# Altium PCB OmniBotRemote.PcbDoc
Units mil, origin at the board's own origin, x right, y up, seen from the top; angles counter-clockwise.
Board outline 5635.03 x 2160.03 mil, 2 copper layers (Top Layer, Bottom Layer); 49 components, 41 nets, 200 pads, 84 vias.
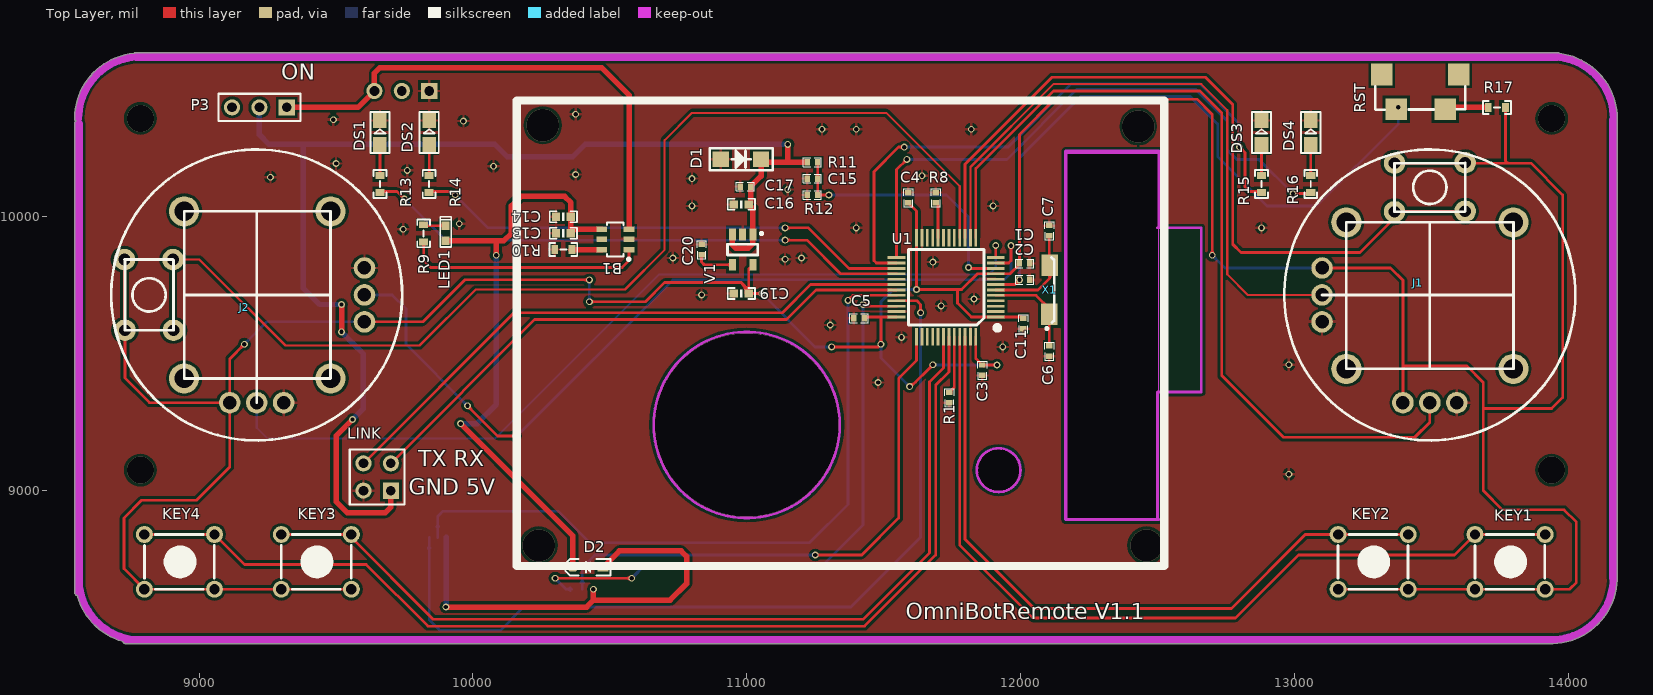
[diagram p0: Top Layer view]
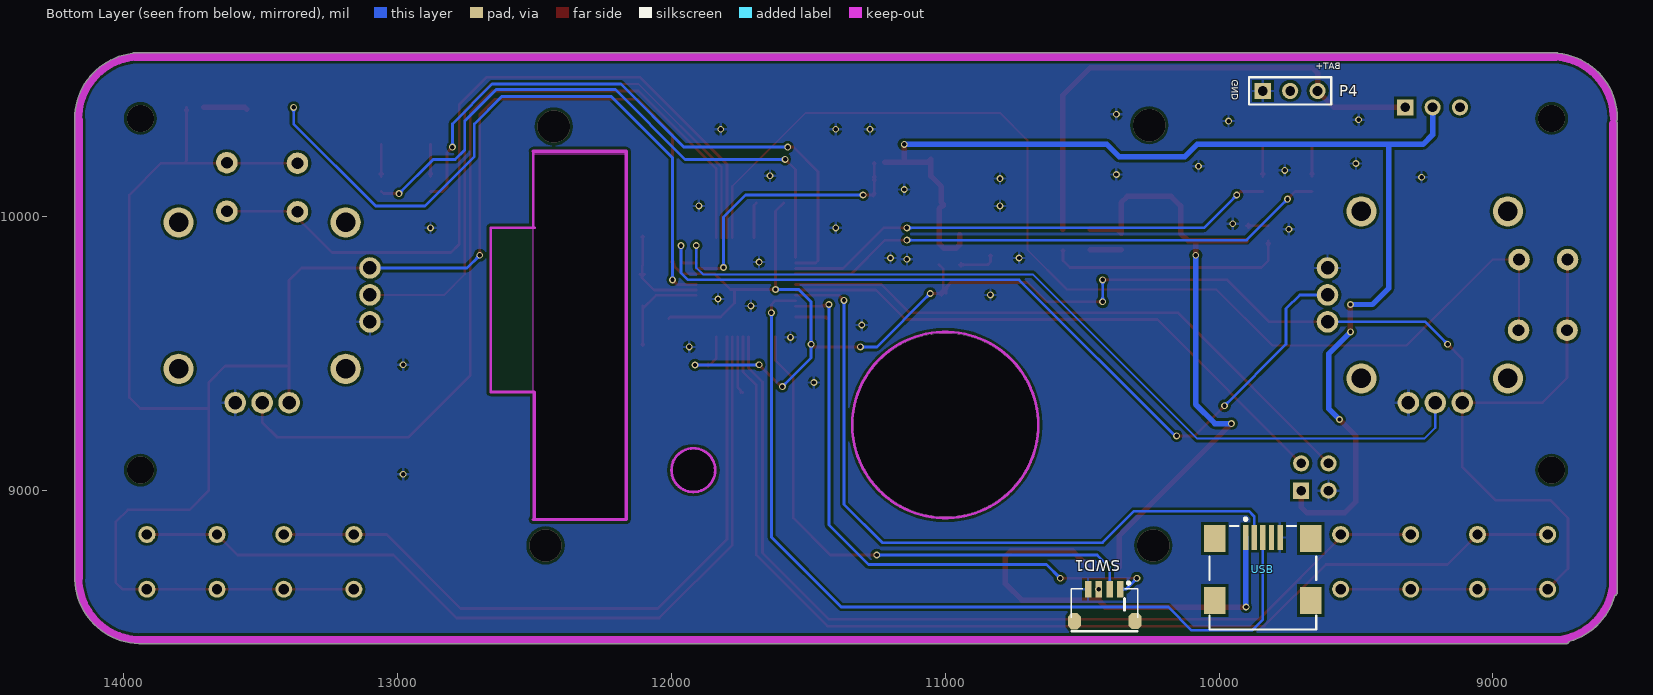
[diagram p1: Bottom Layer view, seen from below]
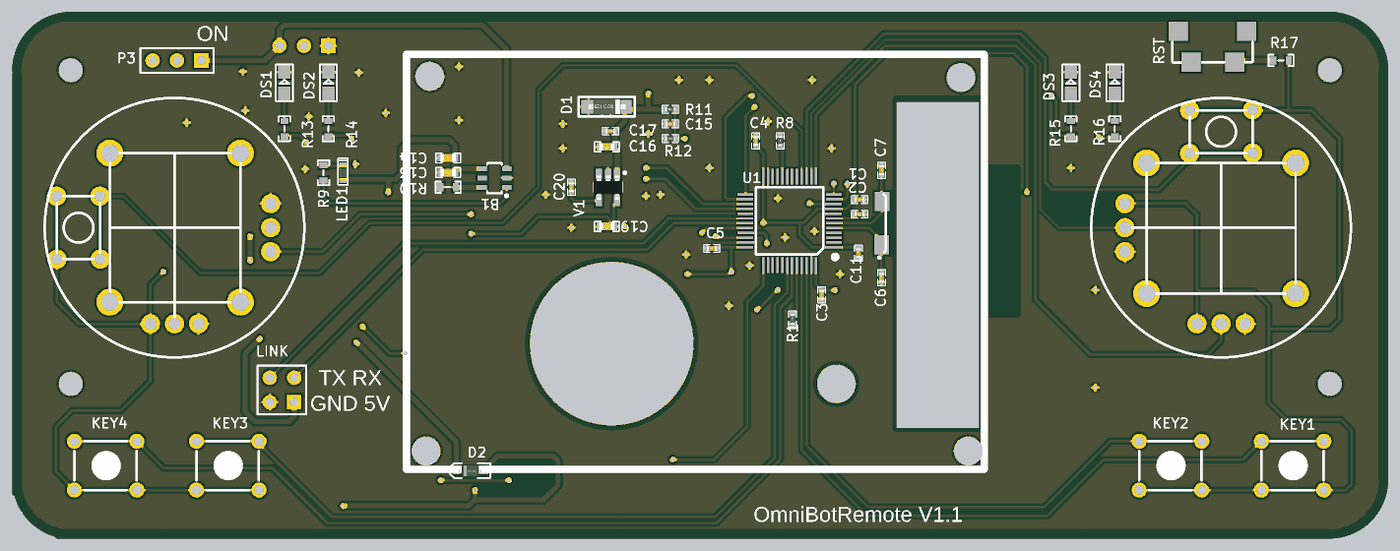
[diagram p2: 3D render of the assembled board from above, using the file's embedded part models]

## Layer stack, top to bottom
Top Layer: signal copper 1.4
Dielectric: dielectric 12.6, FR-4, Dk 4.8
Bottom Layer: signal copper 1.4

## Board outline
8554.94,8615.86 ccw(c8786.11,8680) 8721.22,8449.04 ccw(c8735,8455) 8735,8439.99 13938.89,8439.99 ccw(c13938.89,8455) 13945,8441.28 ccw(c13938.89,8681.11) 14178.72,8675 ccw(c14165,8681.11) 14180.01,8681.11 14180.01,10355 ccw(c14165,10355) 14179.82,10357.4 ccw(c14166.11,10358.89) 14179.9,10358.89 ccw(c13940,10358.89) 13968.97,10597.04 ccw(c13960,10585) 13960,10600.01 8770,10600.01 ccw(c8770,10585) 8761.97,10597.69 ccw(c8785,10358.89) 8545.1,10358.89 ccw(c8558.89,10358.89) 8548.57,10349.74 ccw(c8560,10340) 8544.99,10340 8544.99,8630 ccw(c8560,8630)
cut-out: 12165,10230 12165,8895 12505,8895 12505,10230

## Design rules (kind name [scope] priority, off if disabled: settings)
Clearance Clearance_1 [(InPolygon)] p1: gap=10
Clearance [All] p2: gap=6
PolygonConnect [All] p1: connectstyle=Relief reliefconductorwidth=10 reliefentries=4 polygonreliefangle="90 Angle"
RoutingVias [All] p1: holewidth=28 width=50 viastyle="Through Hole" minholewidth=16 minwidth=25 maxholewidth=28 maxwidth=50
SilkscreenOverComponentPads [All] p1: minsilkscreentomaskgap=10
SolderMaskExpansion [All] p1: expansion=4
TestPointUsage FabricationTestPointUsage [All] p1: valid=0 allowmultiple=FALSE
Testpoint FabricationTestpoint [All] p1: side=3 testpointundercomponent=TRUE minsize=40 maxsize=100 preferedsize=60 minholesize=0 maxholesize=40 preferedholesize=32 testpointgrid=1 style=297 order=0123456789
Width [All] p1: maxlimit=40 minlimit=8 preferedwidth=10 minimp=50.000000 maximp=50.000000 favimp=50.000000
23 further rules are at their usual default settings.

## Components (designator, comment, footprint, x,y, rotation, side; value= is the part's Value field where it differs from the comment)
B1 "TP4059" SOT23-6S 10570,9880.63 r180 top
C1 "1UF" "C 0402" 12015,9830 r180 top
C2 "0.1UF" "C 0402" 12015,9770 r180 top
C3 "1UF" "C 0402" 11860,9440 r90 top
C4 "0.1UF" "C 0402" 11590,10070 r270 top
C5 "0.1UF" "C 0402" 11410,9630 r0 top
C6 "20PF" "C 0402" 12105,9510 r90 top
C7 "20PF" "C 0402" 12105,9950 r270 top
C11 "0.1UF" "C 0402" 12010,9610 r270 top
C13 "0.1UF" C0603 10330,9940.63 r0 top
C14 "10UF" C0603 10330,10000.63 r0 top
C15 "22uF" "C 0402" 11240,10140 r180 top
C16 "10uF" C0603 10980,10045.63 r180 top
C17 "0.1uF" "C 0402" 10995,10110.63 r0 top
C19 "10uF" C0603 10980,9720 r180 top
C20 "0.1uF" "C 0402" 10835,9880.63 r90 top
D1 "IN4733 5.1V" 1n4148-SOD123 10915,10210.63 r0 top
D2 "BAT54WS" SOD-323 10420,8720 r0 top
DS1 "LED1" SMDLED 9660,10265 r90 top
DS2 "LED1" SMDLED 9840,10265 r90 top
DS3 "LED1" SMDLED 12880,10265 r90 top
DS4 "LED1" SMDLED 13060,10265 r90 top
J1 "方向摇杆" 摇杆2 13560,9885 r270 top
J2 "方向摇杆" 摇杆2 9040,9780 r0 top
KEY1 "KEY_M" KEY_M 13660,8840 r0 top
KEY2 "KEY_M" KEY_M 13160,8840 r0 top
KEY3 "KEY_M" KEY_M 9300,8840 r0 top
KEY4 "KEY_M" KEY_M 8800,8840 r0 top
LED1 "DS0" LED_0603 9900,9940 r90 top
LINK "Header 4" HDR2X2 9700,9000 r90 top
P3 "Header 3" HDR1X3 9320,10400 r180 top
P4 "Header 3" HDR1X3 9840,10460 r180 bottom
R1 "1K" "R 0402" 11740,9340 r270 top
R8 "1K" "R 0402" 11690,10070 r270 top
R9 "1K" R0603 9820,9940 r90 top
R10 "1K" R0603 10330,9880.63 r0 top
R11 "4.7K" "R 0402" 11240,10200 r0 top
R12 "4.7K" "R 0402" 11240,10080 r0 top
R13 "100R" R0603 9660,10120 r90 top
R14 "100R" R0603 9840,10120 r90 top
R15 "100R" R0603 12880,10120 r90 top
R16 "100R" R0603 13060,10120 r90 top
R17 "10K" R0603 13740,10400 r0 top
RST "Header 2" KEY_SAD 13600,10520 r180 top
SWD1 "Header 4" "SH1.0-4P - UP" 10360,8640 r0 bottom
U1 "STM32F103C8" LQFP48S 11910,9635 r180 top
USB "USB-B(Mini)" USB/SM0.8-6H5_M 9840,8520 r270 bottom
V1 "RT9193-3.3/LP2985/SPX3819" SOT23-5 10985,9880.32 r90 top
X1 "8MHZ" PXCL 12105,9645 r0 top

## Footprints (in the part's own frame and the unit in brackets; to place one, negate y for a bottom-side part, rotate by r counter-clockwise, add the part's x,y. Pads: shape width x height; smd on the part's side, far side on the other; paste and mask are expansions set on the pad)
1n4148-SOD123 [mm]
  rect 1.5x1.4 smd: 1(-0.254,0) 2(3.494,0)
  silkscreen extent -1.27,-1.02 4.57,1.02, body extent -0.25,-0.85 3.6,0.85, height 1.42
C0603 [mil]
  rect 30x30 smd: 1(-27,0) 2(27.5,-0.06)
  silkscreen extent -50,-20 50,20, body extent -31,-16 31,16, height 12
"C 0402" [mil]
  rect 20x23.62 smd: 1(-19,0) 2(19,0)
  silkscreen extent -33,-16 33,16, body extent -20,-10 20,10, height 20
HDR1X3 [mm] "Connector; Header; 3 Position"
  rect 1.5x1.5 hole 0.9: 1(0,0)
  round 1.5 hole 0.9: 2(2.54,0) 3(5.08,0)
  silkscreen extent -1.27,-1.27 6.35,1.27
HDR2X2 [mm]
  rect 1.5x1.5 hole 0.9: 1(0,0)
  round 1.5 hole 0.9: 2(0,2.54) 3(2.54,0) 4(2.54,2.54)
  silkscreen extent -1.27,-1.27 3.81,3.81
KEY_M [mil]
  round 62 hole 38: 1(0,0) 1(255.91,0) 2(0,-200) 2(255.91,-200)
  silkscreen extent 0,-200 255,0
KEY_SAD [mm]
  rect 2x2 smd: 1(1.245,3.226) 2(5.791,3.226) ""(0,0) ""(7.112,0)
  silkscreen extent -0.61,1.12 7.72,3.28
LED_0603 [mil]
  rect 30x30 smd: 1(-27,0) 2(27.5,-0.06)
  silkscreen extent -50,-20 60,20, body extent -32,-16 32,16, height 43
LQFP48S [mil] "DPIN-0.5"
  rect 65x10 smd: 1(0.42,0.29) 2(0.42,-19.39) 3(0.42,-39.08) 4(0.42,-58.76) 5(0.42,-78.45) 6(0.42,-98.13) 7(0.42,-117.82) 8(0.42,-137.5) 9(0.42,-157.19) 10(0.42,-176.87) 11(0.42,-196.56) 12(0.42,-216.24) 25(362.63,-216.24) 26(362.63,-196.56) 27(362.63,-176.87) 28(362.63,-157.19) 29(362.63,-137.5) 30(362.63,-117.82) 31(362.63,-98.13) 32(362.63,-78.45) 33(362.63,-58.76) 34(362.63,-39.08) 35(362.63,-19.39) 36(362.63,0.29)
  rect 10x65 smd: 13(73.26,-289.08) 14(92.94,-289.08) 15(112.63,-289.08) 16(132.31,-289.08) 17(152,-289.08) 18(171.68,-289.08) 19(191.37,-289.08) 20(211.05,-289.08) 21(230.74,-289.08) 22(250.42,-289.08) 23(270.11,-289.08) 24(289.79,-289.08) 37(289.79,73.13) 38(270.11,73.13) 39(250.42,73.13) 40(230.74,73.13) 41(211.05,73.13) 42(191.37,73.13) 43(171.68,73.13) 44(152,73.13) 45(132.31,73.13) 46(112.63,73.13) 47(92.94,73.13) 48(73.26,73.13)
  silkscreen extent -10,-246 319,46
PXCL [mm]
  rect 1.5x2 smd: 1(0,0) 2(0.051,4.521)
  silkscreen extent -0.34,-1.45 0.46,5.26
R0603 [mil] "ÌùÆ"
  rect 25x33 smd: 1(-31.5,0) 2(31.5,0)
  silkscreen extent -51,-24 51,24, body extent -32,-16 32,16, height 20
"R 0402" [mil]
  rect 20x23.62 smd: 1(-19,0) 2(19,0)
  silkscreen extent -33,-16 33,16, body extent -20,-10 20,10, height 12
"SH1.0-4P - UP" [mm]
  rect 0.6x1.55 smd: 1(0,0) 2(1,0) 3(2,0) 4(3,0)
  oct 1.2x1.5 smd: 1.(4.279,2.972) A(-1.346,2.946)
  silkscreen extent -1.63,-0.7 4.55,3.89
SMDLED [mm]
  rect 1.4x1.27 smd: 1(0.001,-0.002) 2(2.211,-0.002)
  silkscreen extent -0.8,-0.89 3.01,0.89
SOD-323 [mm] "1.8x1.3X0.9mm（长宽高，不包括引脚）"
  rect 1x0.8 smd: 1(1.4,0)
  oct 1x0.8 smd: 2(-1.4,0)
  silkscreen extent -2.11,-0.76 2.11,0.76, body extent -1.31,-0.67 1.34,0.63, height 1
SOT23-5 [mm]
  rect 1.1x0.65 smd: 1(1.4,-0.95) 2(1.4,0) 3(1.4,0.95) 4(-1.4,0.95) 5(-1.4,-0.95)
  silkscreen extent -0.5,-1.88 1.62,1.4, body extent -1.28,-1.5 1.22,1.5, height 1.05
SOT23-6S [mil]
  rect 39.37x20 smd: 1(0,0) 2(0,-37.5) 3(0,-74.8) 4(100,-74.8) 5(100,-37.5) 6(100,0)
  silkscreen extent 0,-99 80,35
USB/SM0.8-6H5_M [mm]
  rect 2.3x0.5 smd: 1(-7.85,-1.6) 2(-7.85,-0.8) 3(-7.85,0) 4(-7.85,0.8) 5(-7.85,1.6)
  rect 2.5x2 smd: 6(-7.75,4.45) 7(-1.996,4.45) 8(-7.75,-4.45) 9(-1.996,-4.45)
  silkscreen extent -9.67,-4.95 0.7,4.95
摇杆2 [mm]
  round 2.8 hole 1.8: 0(-2.413,6.102) 0(-2.413,-9.398) 0(11.176,6.102) 0(11.176,-9.398)
  round 2 hole 1.25: 1(14.318,0.849) 2(14.318,-1.651) 3(14.318,-4.151) 4(6.818,-11.651) 5(4.318,-11.651) 6(1.818,-11.651)
  round 2 hole 1.1: J1(-7.95,1.626) J1(-7.904,-4.925) J2(-3.45,1.626) J2(-3.404,-4.925)
  silkscreen extent -9.18,-15.15 17.82,11.85

## Part data
C1 C2 C3 C4 C5 C11 C13 C14 C15 C16 C19: library part CAP, "Capacitor"
C6 C7: library part C2, "0805"
C17 C20: library part Capacitor, "普通电容"
D1: library part ZENER3, "Zener Diode"
D2: library part BAT54, "单肖特基二极管"
DS1 DS2 DS3 DS4: library part LED2, "Typical RED, GREEN, YELLOW, AMBER GaAs LED"
J1 J2: library part 摇杆_1, "摇杆"
LED1: library part LED, "Typical RED, GREEN, YELLOW, AMBER GaAs LED"
LINK SWD1: "Header, 4-Pin"
P3 P4: "Header, 3-Pin"
R1 R8 R9 R10: library part Res1, "Resistor"
R11 R12 R13 R14 R15 R16 R17: library part Res2, "0603"
RST: "Header, 2-Pin"
U1: library part STM32F103C6
USB: library part USB5
V1: "降压IC"
X1: library part XTAL, "Crystal Oscillator"

## Via types
v1: diameter 25, hole 16, Top Layer to Bottom Layer, 74 vias
v2: diameter 98.43, hole 98.43, Top Layer to Bottom Layer, 4 vias
v3: diameter 118.11, hole 118.11, Top Layer to Bottom Layer, 4 vias
v4: diameter 157.48, hole 157.48, Top Layer to Bottom Layer, 1 vias
v5: diameter 669.29, hole 669.29, Top Layer to Bottom Layer, 1 vias

## Nets (pads, with @x,y where several pads share a name; then routed paths per layer and width w, separated by ;. In a path a pad name is that pad's centre, name@x,y a point inside that pad or via, vN(x,y) a via of type N, cw(c..) or ccw(c..) an arc to the next point about the centre after c; other vN are vias at no path point)
3.3V: C1.2 C3.2 C4.2 C5.2 C11.1 C19.1 J1.3 J1.6 J1.J1 J2.3 J2.6 J2.J1 KEY1.2 KEY2.2 KEY3.2 KEY4.2 R17.2 U1.1 U1.9 U1.24 U1.36 U1.48 V1.5 | length 15940.7
  Top Layer w10: J2.J1@8727,9587.93 J2.J1@8727,9844 ; 8728.83,9451.17 8728.83,9586.09 8728.83,9411.17 8818.7,9321.3 J2.6 ; v1@9157.5,9535 cw(c9139.39,9535) 9152.2,9522.2 cw(c9165,9509.39) v1@9165,9527.5 ; v1(9165,9535) 9111.57,9481.57 J2.6 ; KEY3.2@9555.91,8640 9300,8640 9055.91,8640 8800,8640 8725,8715 8725,8900 8790,8965 8990,8965 9111.57,9086.57 J2.6 ; J2.3 9816.57,9616.57 9970,9770 v1(10425,9770) ; v1@10419.7,9764.7 ccw(c10406.89,9751.89) 10406.89,9770 ccw(c10406.89,9788.11) v1@10419.7,9775.3 ; v1(10425,9690) 10630,9690 10700,9760 10760,9760 10980,9760 11007,9733 C19.1 ; v1@10430.3,9684.7 cw(c10443.11,9671.89) 10443.11,9690 cw(c10443.11,9708.11) v1@10430.3,9695.3 ; 10980.74,9759.26 cw(c10941.47,9720) C19.1@10997,9720 ; 10997.81,9742.19 cw(c10975.62,9720) C19.1 ; C19.1@10999.93,9727.07 ccw(c10982.86,9744.14) 11007,9744.14 ccw(c11031.14,9744.14) 11014.07,9727.07 ccw(c11031.14,9744.14) 11031.14,9720 ccw(c11031.14,9695.86) C19.1@11014.07,9712.93 ; V1.5 11007,9809.8 C19.1 ; v1@11049.7,9714.7 ccw(c11036.89,9701.89) 11036.89,9720 ccw(c11036.89,9738.11) v1@11049.7,9725.3 ; v1(11055,9720) C19.1 ; v1(11310,9525) 11480,9525 v1(11490,9535) 11490,9634.71 ; v1@11315.3,9519.7 cw(c11328.11,9506.89) 11328.11,9525 cw(c11328.11,9543.11) v1@11315.3,9530.3 ; C5.2 11433.71,9634.71 11490,9634.71 ; C5.2@11432.54,9628.28 cw(c11448.07,9612.74) 11448.07,9634.71 ; v1@11484.7,9540.3 ccw(c11471.89,9553.11) 11490,9553.11 ccw(c11508.11,9553.11) v1@11495.3,9540.3 ; U1.36 11490,9634.71 ; C4.2 11620.21,10020.79 U1.24 v1@11620.21,9735.21 ; v1@11595,9387.5 ccw(c11595,9417.68) 11616.34,9396.34 ; v1@11600,9380 v1(11680,9460) ; v1(11620,9735) 11770,9735 ; v1@11625.3,9729.7 cw(c11638.11,9716.89) 11638.11,9735 cw(c11638.11,9753.11) v1@11625.3,9740.3 ; v1@11672.5,9460 cw(c11654.39,9460) 11667.2,9447.2 cw(c11680,9434.39) v1@11680,9452.5 ; U1.48 11836.74,9482.26 C3.2 v1(11914,9459) ; C3.2@11865.35,9455.46 cw(c11873.88,9446.93) 11873.88,9459 cw(c11873.88,9471.07) C3.2@11865.35,9462.54 ; v1@11908.7,9453.7 ccw(c11895.89,9440.89) 11895.89,9459 ccw(c11895.89,9477.11) v1@11908.7,9464.3 ; 11985.92,9815.92 ccw(c11973.64,9828.19) C1.2@11991,9828.19 ; C1.2@11992.46,9835.35 ccw(c11983.93,9843.88) 11996,9843.88 ccw(c12008.07,9843.88) C1.2@11999.54,9835.35 ; C11.1 12004.29,9634.71 U1.1 11820.29,9634.71 11770,9685 11770,9735 ; v1@12694.7,9865.3 ccw(c12681.89,9878.11) 12700,9878.11 ccw(c12718.11,9878.11) v1@12705.3,9865.3 ; v1(12700,9860) 12700,10375 12645,10430 12125,10430 11996,10301 C1.2 11996,9826 11962.19,9792.19 U1.9 11842.19,9792.19 11785,9735 11770,9735 ; J1.6 13351.57,9813.43 13396.57,9768.43 13396.57,9455 ; KEY2.2@13160,8640 13415.91,8640 13660,8640 13915.91,8640 14005,8640 14030,8665 14030,8885 13985,8930 13760,8930 13690,9000 13690,9300 ; J1.J1@13366.09,10196.17 13780,10196.17 ; J1.3 13396.57,9455 ; R17.2@13766.2,10390.7 cw(c13753.39,10377.89) 13771.5,10377.89 cw(c13789.61,10377.89) R17.2@13776.8,10390.7 ; R17.2 13771.5,10204.67 13780,10196.17 ; 13396.57,9455 13630,9455 13690,9395 13690,9300 ; 13690,9300 13940,9300 13980,9340 13980,10080 13863.83,10196.17 13780,10196.17
  Bottom Layer w10: v1(9165,9535) 9246.57,9616.57 J2.3 ; v1@9165,9542.5 ccw(c9165,9560.61) 9177.8,9547.8 ccw(c9190.61,9535) v1@9172.5,9535 ; v1@10419.7,9695.3 ccw(c10406.89,9708.11) 10425,9708.11 ccw(c10443.11,9708.11) v1@10430.3,9695.3 ; v1@10419.7,9764.7 cw(c10406.89,9751.89) 10425,9751.89 cw(c10443.11,9751.89) v1@10430.3,9764.7 ; v1(10425,9690) v1(10425,9770) ; v1@11055,9712.5 cw(c11055,9694.39) 11067.8,9707.2 cw(c11080.61,9720) v1@11062.5,9720 ; v1(11055,9720) 11250,9525 v1(11310,9525) ; v1@11304.7,9519.7 ccw(c11291.89,9506.89) 11291.89,9525 ccw(c11291.89,9543.11) v1@11304.7,9530.3 ; v1@11484.7,9529.7 cw(c11471.89,9516.89) 11490,9516.89 cw(c11508.11,9516.89) v1@11495.3,9529.7 ; v1@11484.7,9540.3 ccw(c11471.89,9553.11) 11490,9553.11 ccw(c11508.11,9553.11) v1@11495.3,9540.3 ; v1@11587.5,9380 ccw(c11569.39,9380) 11582.2,9392.8 ccw(c11595,9405.61) v1@11595,9387.5 ; v1(11595,9380) 11490,9485 v1(11490,9535) 11490,9690 11535,9735 v1(11620,9735) ; v1@11614.7,9729.7 ccw(c11601.89,9716.89) 11601.89,9735 ccw(c11601.89,9753.11) v1@11614.7,9740.3 ; v1@11681,9459 v1(11914,9459) ; v1@11908.7,9453.7 ccw(c11895.89,9440.89) 11895.89,9459 ccw(c11895.89,9477.11) v1@11908.7,9464.3 ; v1@12700,9852.5 cw(c12700,9834.39) 12712.8,9847.2 cw(c12725.61,9860) v1@12707.5,9860 ; v1(12700,9860) 12746.57,9813.43 J1.6
AD_BAT: C15.1 R11.2 R12.2 U1.10 | length 1170.1
  Top Layer w10: R12.2@11255.46,10085.35 ccw(c11246.93,10093.88) 11259,10093.88 ccw(c11271.07,10093.88) R12.2@11262.54,10085.35 ; C15.1@11255.46,10134.65 cw(c11246.93,10126.12) 11259,10126.12 cw(c11271.07,10126.12) C15.1@11262.54,10134.65 ; C15.1@11255.46,10145.35 ccw(c11246.93,10153.88) 11259,10153.88 ccw(c11271.07,10153.88) C15.1@11262.54,10145.35 ; R11.2@11255.46,10194.65 cw(c11246.93,10186.12) 11259,10186.12 cw(c11271.07,10186.12) R11.2@11262.54,10194.65 ; R11.2 C15.1 R12.2 v1(11300,10080) ; R12.2@11262.54,10076.46 cw(c11271.07,10067.93) 11271.07,10080 cw(c11271.07,10092.07) R12.2@11262.54,10083.54 ; v1@11294.7,10074.7 ccw(c11281.89,10061.89) 11281.89,10080 ccw(c11281.89,10098.11) v1@11294.7,10085.3 ; v1(11810,9815) 11813.13,9811.87 U1.10
  Bottom Layer w10: v1(11300,10080) 11730,10080 11810,10000 v1(11810,9815) ; v1@11305.3,10074.7 cw(c11318.11,10061.89) 11318.11,10080 cw(c11318.11,10098.11) v1@11305.3,10085.3 ; v1@11804.7,9820.3 ccw(c11791.89,9833.11) 11810,9833.11 ccw(c11828.11,9833.11) v1@11815.3,9820.3
AD_P0: J2.2 U1.11 | length 3253.4
  Top Layer w10: v1@9980,9302.5 cw(c9980,9284.39) 9992.8,9297.2 cw(c10005.61,9310) v1@9987.5,9310 ; v1(9980,9310) 10090,9200 v1(10155,9200) ; v1@10149.7,9194.7 ccw(c10136.89,9181.89) 10136.89,9200 ccw(c10136.89,9218.11) v1@10149.7,9205.3 ; U1.11 11956.56,9831.56 11965,9840 v1(11965,9895) ; v1@11959.7,9889.7 cw(c11946.89,9876.89) 11965,9876.89 cw(c11983.11,9876.89) v1@11970.3,9889.7
  Bottom Layer w10: J2.2 9705,9715 9755,9665 9755,9535 v1(9980,9310) ; v1@9972.5,9310 ccw(c9954.39,9310) 9967.2,9322.8 ccw(c9980,9335.61) v1@9980,9317.5 ; v1(10155,9200) 10160,9200 10730,9770 11940,9770 11965,9795 v1(11965,9895) ; v1@11959.7,9889.7 cw(c11946.89,9876.89) 11965,9876.89 cw(c11983.11,9876.89) v1@11970.3,9889.7
AD_P1: J1.2 U1.13 | length 3208.7
  Top Layer w10: U1.13 11836.74,10051.74 11836.74,10176.74 12120,10460 12655,10460 12735,10380 12735,10010 12735,9420 12960,9195 13440,9195 13495,9250 J1.2
AD_R0: J2.5 U1.12 | length 3191.2
  Top Layer w8: U1.12 v1(11909.58,9895.42)
  Bottom Layer w8: J2.5 9210,9230 9250,9190 10080,9190 10680,9790 11885,9790 11909.58,9814.58 v1(11909.58,9895.42)
AD_R1: J1.5 U1.14 | length 2338.1
  Top Layer w8: U1.14 11817.06,10062.06 11817.06,10182.06 12120,10485 12660,10485 12755,10390 12755,9790 12830,9715 J1.5
AD_S0: J2.J2 U1.16 | length 4145.2
  Top Layer w8: J2.J2@8904.17,9587.93 8904.17,9844 9001,9844 9315,9530 9805,9530 10010,9735 10555,9735 10700,9880 10700,10280 10800,10380 11510,10380 11777.69,10112.31 U1.16
AD_S1: J1.J2 U1.15 | length 2868.1
  Top Layer w10: U1.15 11797.37,10192.37 12115,10510 12675,10510 12775,10410 12775,9900 12805,9870 13240,9870 13366.09,9996.09 13366.09,10019 J1.J2@13367.93,10019 ; J1.J2@13367.93,10020.83 13624,10020.83 J1.J2@13622.17,10019
BAT_C: B1.3 P3.1 P4.3 | length 1879.1
  Top Layer w20: P3.1 9580,10400 P4.3 9640,10525 9660,10545 10470,10545 10570,10445 B1.3
BAT_IN: C16.1 C17.2 D1.2 LINK.1 P3.2 R11.1 V1.1 V1.3 | length 4572.9
  Top Layer w20: v1(9520,9580) v1(9520,9680) ; v1(9560,9260) 9500,9200 9500,8960 9540,8920 9680,8920 9700,8940 LINK.1 ; V1.3 10947.6,9897.4 10960,9885 11005,9885 11022.4,9902.4 V1.1 11022.4,10030.23 C16.1 11014,10052.63 C17.2 11052.56,10149.19 D1.2 11063.19,10200 11150,10200 ; C16.1@11006.67,10040.64 cw(c11005.57,10023.85) 11022.4,10023.85 ; v1(11150,10265) 11150,10200 ; R11.1 11150,10200
  Bottom Layer w20: P3.2 9220,10300 9255,10265 9380,10265 ; v1(9520,9580) 9600,9500 9600,9300 v1(9560,9260) ; v1(9520,9680) 9440,9680 9380,9740 9380,10265 ; v1(11150,10265) 10410,10265 10365,10220 10125,10220 10080,10265 9380,10265
CLK_C8: SWD1.2 U1.37 | length 2081.7
  Top Layer w10: v1(11250,8765) 11420,8765 11555,8900 11555,9410 11620.21,9475.21 U1.37 U1.37@11620,9561.67 ; v1@11255.3,8759.7 cw(c11268.11,8746.89) 11268.11,8765 cw(c11268.11,8783.11) v1@11255.3,8770.3
  Bottom Layer w10: SWD1.2@10394.55,8663.52 ccw(c10382.93,8675.14) 10399.37,8675.14 ccw(c10415.81,8675.14) SWD1.2@10404.19,8663.52 ; SWD1.2 10399.37,8689.37 10399.37,8719.37 10445,8765 v1(11250,8765) ; v1@11244.7,8759.7 ccw(c11231.89,8746.89) 11231.89,8765 ccw(c11231.89,8783.11) v1@11244.7,8770.3
DM: U1.32 USB.2 | length 2694.5
  Top Layer w10: v1(11370,9695) 11388.45,9713.45 U1.32 ; v1@11370,9702.5 ccw(c11370,9720.61) 11382.8,9707.8 ccw(c11395.61,9695) v1@11377.5,9695
  Bottom Layer w10: USB.2@9868.07,8867.91 ccw(c9859.81,8876.18) 9871.5,8876.18 ccw(c9883.19,8876.18) USB.2@9874.92,8867.91 ; USB.2 9871.5,8906.5 9890,8925 10310,8925 10425,8810 11230,8810 11370,8950 v1(11370,9695) ; v1@11364.7,9689.7 cw(c11351.89,9676.89) 11370,9676.89 cw(c11388.11,9676.89) v1@11375.3,9689.7
DP: U1.33 USB.3 | length 3270
  Top Layer w10: U1.33 11621.24,9693.76 11635,9680 v1(11635,9650) ; v1@11629.7,9655.3 ccw(c11616.89,9668.11) 11635,9668.11 ccw(c11653.11,9668.11) v1@11640.3,9655.3
  Bottom Layer w10: USB.3@9836.58,8790.2 cw(c9828.31,8781.93) 9840,8781.93 cw(c9851.69,8781.93) USB.3@9843.43,8790.2 ; USB.3 9840,8530 9880,8490 10100,8490 10185,8575 10400,8575 11380,8575 11635,8830 v1(11635,9650) ; v1@11629.7,9644.7 cw(c11616.89,9631.89) 11635,9631.89 cw(c11653.11,9631.89) v1@11640.3,9644.7
GND: B1.2 C1.1 C2.1 C3.1 C4.1 C5.1 C6.1 C7.1 C11.2 C13.1 C14.1 C15.2 C16.2 C17.1 C19.2 C20.2 D1.1 DS1.2 DS2.2 DS3.2 DS4.2 J1.1 J1.4 J2.1 J2.4 LINK.2 P4.1 R1.2 R8.1 R10.1 R12.1 SWD1.4 U1.8 U1.23 U1.35 U1.47 USB.5 V1.2
  other v1: 12980,9060 11480,9395 12980,9460 11935,9525 11565,9560 11305,9605 11710,9675 11830,9700 10835,9715 11680,9835 11140,9845 10730,9850 11200,9850 9745,9955 11400,9960 12880,9960 9950,9975 10800,10040 11900,10040 11150,10100 10800,10140 9260,10145 11640,10150 10375,10155 9760,10170 10075,10185 9500,10195 11275,10320 11400,10320 11820,10320 9965,10350 9490,10355 10375,10375
KEY_S1: KEY1.1 U1.45 | length 3134.8
  Top Layer w10: U1.45 11777.69,8802.31 12045,8535 12785,8535 13015,8765 13585,8765 13660,8840 KEY1.1@13915.91,8840
KEY_S2: KEY2.1 U1.46 | length 2574.3
  Top Layer w10: U1.46 11797.37,8822.63 12050,8570 12770,8570 13040,8840 13160,8840 KEY2.1@13415.91,8840
KEY_S3: KEY3.1 U1.42 | length 3406.9
  Top Layer w10: KEY3.1@9300,8840 9545,8840 9855,8530 11425,8530 11667.43,8772.43 11667.43,9397.43 11718.63,9448.63 U1.42
KEY_S4: KEY4.1 U1.43 | length 3953.3
  Top Layer w10: KEY4.1@8800,8840 9055.91,8840 9165.91,8730 9610,8730 9835,8505 11430,8505 11690,8765 11690,9385 11738.32,9433.32 U1.43
LED1: R13.1 U1.28 | length 2125.7
  Top Layer w10: R13.1@9660,10093 9722,10093 v1(9750,10065) ; v1@9742.5,10065 ccw(c9724.39,10065) 9737.2,10077.8 ccw(c9750,10090.61) v1@9750,10072.5 ; v1(11140,9915) 11220,9915 11342.81,9792.19 U1.28 ; v1@11145.3,9909.7 cw(c11158.11,9896.89) 11158.11,9915 cw(c11158.11,9933.11) v1@11145.3,9920.3
  Bottom Layer w10: v1@9750,10057.5 cw(c9750,10039.39) 9762.8,10052.2 cw(c9775.61,10065) v1@9757.5,10065 ; v1(9750,10065) 9900,9915 v1(11140,9915) ; v1@11134.7,9909.7 ccw(c11121.89,9896.89) 11121.89,9915 ccw(c11121.89,9933.11) v1@11134.7,9920.3
LED2: R14.1 U1.27 | length 1909.1
  Top Layer w10: R14.1@9840,10093 9922,10093 v1(9935,10080) ; v1(11140,9960) 11225,9960 11373.13,9811.87 U1.27 ; v1@11145.3,9954.7 cw(c11158.11,9941.89) 11158.11,9960 cw(c11158.11,9978.11) v1@11145.3,9965.3
  Bottom Layer w10: v1@9935,10072.5 cw(c9935,10054.39) 9947.8,10067.2 cw(c9960.61,10080) v1@9942.5,10080 ; v1(9935,10080) 10055,9960 v1(11140,9960) ; v1@11134.7,9954.7 ccw(c11121.89,9941.89) 11121.89,9960 ccw(c11121.89,9978.11) v1@11134.7,9965.3
LED3: R15.1 U1.26 | length 2357.6
  Top Layer w10: U1.26 11473.44,9831.56 11465,9840 11465,10165 11555,10255 v1(11575,10255) ; v1@11569.7,10249.7 ccw(c11556.89,10236.89) 11556.89,10255 ccw(c11556.89,10273.11) v1@11569.7,10260.3 ; v1@12800,10247.5 cw(c12800,10229.39) 12812.8,10242.2 cw(c12825.61,10255) v1@12807.5,10255 ; v1(12800,10255) 12820,10235 12820,10110 12837,10093 R15.1@12880,10093
  Bottom Layer w10: v1(11575,10255) 11955,10255 12185,10485 12655,10485 12800,10340 v1(12800,10255) ; v1@11580.3,10249.7 cw(c11593.11,10236.89) 11593.11,10255 cw(c11593.11,10273.11) v1@11580.3,10260.3 ; v1@12794.7,10260.3 ccw(c12781.89,10273.11) 12800,10273.11 ccw(c12818.11,10273.11) v1@12805.3,10260.3
LED4: R16.1 U1.25 | length 2291
  Top Layer w10: U1.25 11547.37,10172.37 v1(11585,10210) ; v1@11577.5,10210 cw(c11559.39,10210) 11572.2,10197.2 cw(c11585,10184.39) v1@11585,10202.5 ; v1(12995,10085) 13052,10085 R16.1@13060,10093 ; v1@13000.3,10079.7 cw(c13013.11,10066.89) 13013.11,10085 cw(c13013.11,10103.11) v1@13000.3,10090.3
  Bottom Layer w10: v1(11585,10210) 11950,10210 12205,10465 12640,10465 12755,10350 12755,10245 12790,10210 12870,10210 v1(12995,10085) ; v1@11590.3,10204.7 cw(c11603.11,10191.89) 11603.11,10210 cw(c11603.11,10228.11) v1@11590.3,10215.3 ; v1@12987.5,10085 ccw(c12969.39,10085) 12982.2,10097.8 ccw(c12995,10110.61) v1@12995,10092.5
NetB1_1: B1.1 R9.1 | length 931.7
  Top Layer w10: R9.1@9814.7,9903.2 cw(c9801.89,9890.39) 9820,9890.39 cw(c9838.11,9890.39) R9.1@9825.3,9903.2 ; R9.1@9820,9913 9820,9840 9845,9815 10545,9815 10570,9840 B1.1 ; B1.1@10566.46,9877.09 cw(c10557.93,9868.56) 10570,9868.56 cw(c10582.07,9868.56) B1.1@10573.54,9877.09
NetB1_6: B1.6 R10.2 | length 112.5
  Top Layer w20: R10.2@10357.5,9880.57 10357.56,9880.63 B1.6
NetC2_2: C2.2 RST.2 U1.7 | length 2534.8
  Top Layer w10: U1.7 11978.82,9752.82 v1(11996,9770) ; 11984.37,9758.37 cw(c11996,9746.75) C2.2@11996,9763.19 ; C2.2@11988.5,9770 cw(c11970.39,9770) 11983.2,9757.2 cw(c11996,9744.39) C2.2@11996,9762.5
  Bottom Layer w10: v1@11990.7,9775.3 ccw(c11977.89,9788.11) 11996,9788.11 ccw(c12014.11,9788.11) v1@12001.3,9775.3 ; v1(11996,9770) 11996,10216 12220,10440 12620,10440 12720,10340 12720,10220 12900,10040 13080,10040 13380,10340 v1(13380,10400) ; v1@13374.7,10394.7 cw(c13361.89,10381.89) 13380,10381.89 cw(c13398.11,10381.89) v1@13385.3,10394.7
NetC6_2: C6.2 U1.5 X1.1 | length 380.5
  Top Layer w10: U1.5 12056.55,9713.45 X1.1@12105,9665 ; C6.2@12101.46,9532.54 ccw(c12092.93,9541.07) 12105,9541.07 ccw(c12117.07,9541.07) C6.2@12108.54,9532.54 ; C6.2 X1.1 X1.1@12105,9665 ; X1.1@12105,9675 X1.1@12105,9665
NetC7_2: C7.2 U1.6 X1.2 | length 423.7
  Top Layer w10: U1.6 12063.13,9733.13 12107,9777 ; X1.2@12097.93,9790.37 cw(c12092.61,9777) 12107,9777 ; C7.2@12101.46,9927.46 cw(c12092.93,9918.93) 12105,9918.93 cw(c12117.07,9918.93) C7.2@12108.54,9927.46 ; C7.2 12105,9825 X1.2 12107,9777 ; X1.2@12116.07,9790.37 ccw(c12121.39,9777) 12107,9777
NetC20_1: C20.1 V1.4 | length 191.8
  Top Layer w10: C20.1@10831.46,9858.09 cw(c10822.93,9849.56) 10835,9849.56 cw(c10847.07,9849.56) C20.1@10838.54,9858.09 ; C20.1 10835,9835 10844.8,9825.2 V1.4 ; V1.4@10942.09,9819.68 ccw(c10928.78,9806.38) 10928.78,9825.2 ccw(c10928.78,9844.02) V1.4@10942.09,9830.71
NetD2_1: D2.1 SWD1.3 USB.1 | length 1669.5
  Top Layer w20: v1(9900.98,8575) 10415,8575 10440,8600 ; v1(10440,8640) 10440,8600 ; D2.1 10535.12,8780 10760,8780 10780,8760 10780,8660 10720,8600 10440,8600 ; D2.1@10484.8,8720 cw(c10508.18,8720) 10491.65,8736.53
  Bottom Layer w20: v1(9900.98,8575) 9902.99,8572.99 USB.1
NetDS1_1: DS1.1 R13.2 | length 146
  Top Layer w10: R13.2@9654.7,10156.8 ccw(c9641.74,10169.76) 9660.06,10169.76 ; R13.2@9660.06,10147.5 DS1.1 ; 9660.06,10169.45 ccw(c9677.95,10169.45) R13.2@9665.3,10156.8
NetDS2_1: DS2.1 R14.2 | length 146
  Top Layer w10: R14.2@9834.7,10156.8 ccw(c9821.74,10169.76) 9840.06,10169.76 ; R14.2@9840.06,10147.5 DS2.1 ; 9840.06,10169.45 ccw(c9857.95,10169.45) R14.2@9845.3,10156.8
NetDS3_1: DS3.1 R15.2 | length 146
  Top Layer w10: R15.2@12874.7,10156.8 ccw(c12861.74,10169.76) 12880.06,10169.76 ; R15.2@12880.06,10147.5 DS3.1 ; 12880.06,10169.45 ccw(c12897.95,10169.45) R15.2@12885.3,10156.8
NetDS4_1: DS4.1 R16.2 | length 146
  Top Layer w10: R16.2@13054.7,10156.8 ccw(c13041.74,10169.76) 13060.06,10169.76 ; R16.2@13060.06,10147.5 DS4.1 ; 13060.06,10169.45 ccw(c13077.95,10169.45) R16.2@13065.3,10156.8
NetLED1_2: LED1.2 R9.2 | length 117.9
  Top Layer w10: R9.2@9820.06,9967.5 LED1.2 ; LED1.2@9892.99,9960.43 ccw(c9875.92,9943.36) 9875.92,9967.5 ccw(c9875.92,9991.64) LED1.2@9892.99,9974.57
NetR1_1: R1.1 U1.44 | length 223.2
  Top Layer w10: R1.1 11758,9377 U1.44 ; R1.1@11746.81,9359 cw(c11763.25,9359) 11751.63,9370.63
NetR8_2: R8.2 U1.20 | length 130.6
  Top Layer w10: R8.2 11698.95,10042.05 U1.20
NetR17_1: R17.1 RST.1 | length 160.4
  Top Layer w20: RST.1 13558,10400 R17.1
SWD_C8: SWD1.1 U1.34 | length 2410.3
  Top Layer w10: v1(10300,8680) v1(10580,8680) ; v1@10305.3,8674.7 cw(c10318.11,8661.89) 10318.11,8680 cw(c10318.11,8698.11) v1@10305.3,8685.3 ; v1@10574.7,8674.7 ccw(c10561.89,8661.89) 10561.89,8680 ccw(c10561.89,8698.11) v1@10574.7,8685.3 ; v1(11425,9680) 11430.92,9674.08 U1.34 ; v1@11430.3,9685.3 ccw(c11457.4,9712.4) 11457.4,9674.08
  Bottom Layer w10: v1@10300,8672.5 cw(c10300,8654.39) 10312.8,8667.2 cw(c10325.61,8680) v1@10307.5,8680 ; v1(10300,8680) 10340,8640 SWD1.1 ; SWD1.1@10355.18,8635.18 ccw(c10343.56,8623.56) 10343.56,8640 ccw(c10343.56,8656.44) SWD1.1@10355.18,8644.82 ; v1(10580,8680) 10630,8730 11280,8730 11425,8875 v1(11425,9680) ; v1@10580,8687.5 ccw(c10580,8705.61) 10592.8,8692.8 ccw(c10605.61,8680) v1@10587.5,8680 ; v1@11419.7,9674.7 cw(c11406.89,9661.89) 11425,9661.89 cw(c11443.11,9661.89) v1@11430.3,9674.7
UART1_R_1: LINK.3 U1.31 | length 2109.6
  Top Layer w10: LINK.3 10225,9625 11145,9625 11253.13,9733.13 U1.31
UART1_T_1: LINK.4 U1.30 | length 2217.8
  Top Layer w10: LINK.4 10150,9650 11130,9650 11232.82,9752.82 U1.30
VBUS: B1.4 C13.2 C14.2 D2.2 LED1.1 | length 2287.8
  Top Layer w20: LED1.1 10085,9913 ; v1(9955,9245) 10220,8980 10364,8836 D2.2@10364,8720 ; v1(10085,9860) 10085,9913 ; 10364,8736.01 ccw(c10380.89,8736.01) D2.2@10368.95,8724.06 ; B1.4 10372.37,9955.43 C13.2 C14.2 10357.5,10052.5 10335,10075 10175,10075 10140,10040 10140,9940 10113,9913 10085,9913
  Bottom Layer w20: v1(9955,9245) 10015,9245 10085,9315 v1(10085,9860)
pads on no net: B1.5 J1.0 J2.0 P3.3 P4.2 RST. SWD1.1. SWD1.A U1.2 U1.3 U1.4 U1.17 U1.18 U1.19 U1.21 U1.22 U1.29 U1.38 U1.39 U1.40 U1.41 USB.4 USB.6 USB.7 USB.8 USB.9
copper on no net:
  other v2: 8785,9075 13940,9075 8785,10360 13940,10360
  other v3: 10240,8800 12460,8800 12430,10330 10255,10335
  other v4: 11920,9075
  other v5: 11000,9240

## Polygon pours and split planes (outlines as drawn)
GND on Top Layer "Top Layer-No Net" (solid, remove dead copper, pour order 1000): 8435.62,10799.27 8360.62,10724.27 8360.62,8404.27 14405.62,8404.27 14415.62,8394.27 14310.62,8499.27 14310.62,10799.27
GND on Bottom Layer "Top Layer-No Net" (solid, remove dead copper, pour order 1001): 8508.22,10638.03 8508.22,8413.03 8483.22,8388.03 8498.22,8373.03 14373.22,8373.03 14373.22,10613.03 14403.22,10643.03

## Keep-outs
Keep-Out Layer:
  circle w10: c10999.96,9240 r340.04
  circle w10: c11920,9075 r80
  lines w10: 12500,8895 12500,9360 12660,9360 12660,9960 12500,9960 12505,9965 12505,10240
  lines w11.81: 12505,8895 12165,8895 12165,10240 12505,10240
  lines w27.56: 8558.89,10358.89 cw(c8785,10358.89) 8785,10585 ; 8560,8680 ccw(c8786.11,8680) 8786.11,8453.89 ; 13938.89,8455 ccw(c13938.89,8681.11) 14165,8681.11 ; 13940,10585 cw(c13940,10358.89) 14166.11,10358.89
  lines w30: 8560,8630 8560,10340 ; 8735,8455 13938.89,8455 ; 8770,10585 13960,10585 ; 14165,8681.11 14165,10355

## Silkscreen, mask and mechanical layers (free items; w line width, h text height)
Top Overlay:
  lines w30: 10160,8725 10160,10425 12525,10425 12525,8725 10160,8725
  text "ON" at 9300,10480 h100
  text "TX RX" at 9800,9070 h100
  text "GND 5V" at 9765,8965 h100
  text "OmniBotRemote V1.1" at 11580,8510 h100
Bottom Overlay:
  text "BAT+" at 9555,10530 h40
  text "GND" at 9920,10500 h40 r270
Mechanical 1:
  lines w30: 12505,8900 12165,8900 12165,10235 12500,10235 12505,10230